# Altium PCB CR-10 Motherboard.PcbDoc (part 5 of 14)
Units mil, origin at the board's own origin, x right, y up, seen from the top; angles counter-clockwise.
Board outline 3970.48 x 2769.68 mil, 2 copper layers (TopLayer, BottomLayer); 147 components, 128 nets, 667 pads, 614 vias.
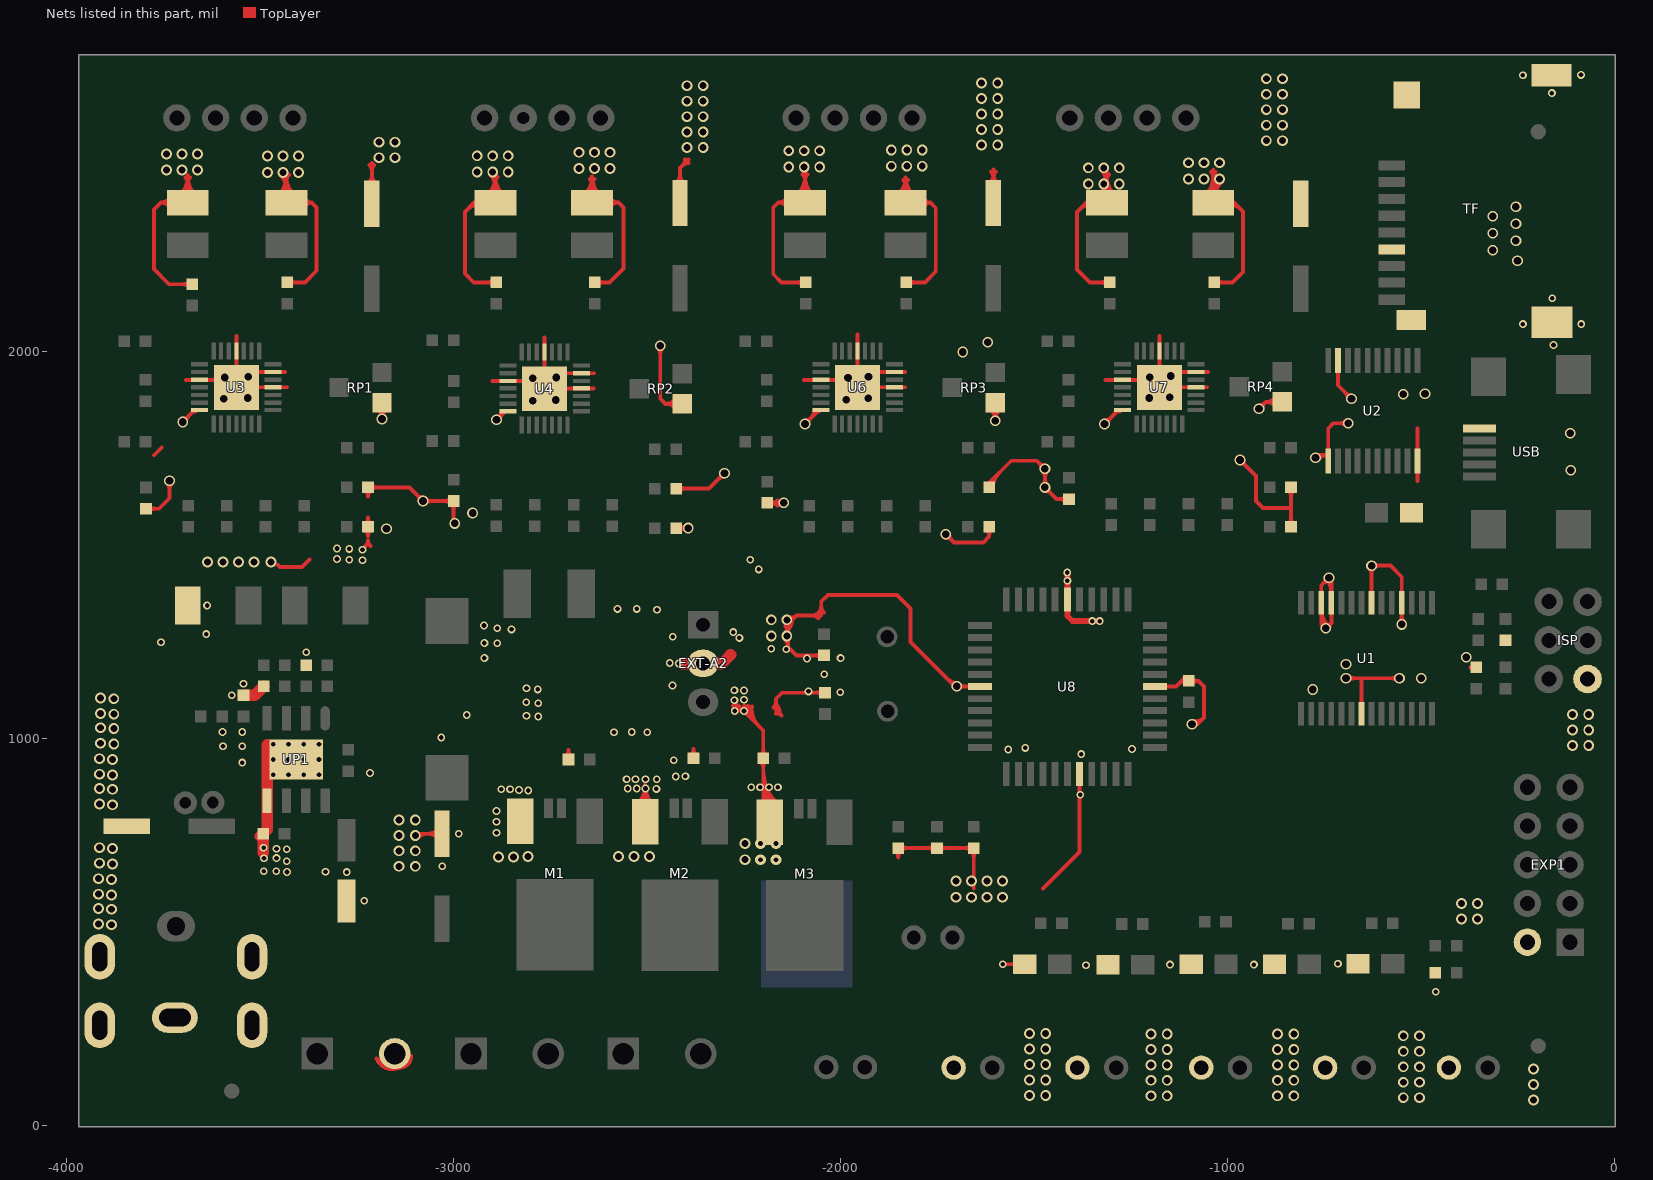
[diagram p5: the nets of this part, all layers, seen from the top]

## Via types
v1: diameter 28, hole 18, TopLayer to BottomLayer, tented both sides, 246 vias
v2: diameter 27.56, hole 19.68, TopLayer to BottomLayer, tented both sides, 196 vias
v3: diameter 20, hole 12, TopLayer to BottomLayer, tented both sides, 124 vias
v4: diameter 27.56, hole 11.81, TopLayer to BottomLayer, tented bottom, 16 vias
v5: diameter 27.56, hole 19.68, TopLayer to BottomLayer, 16 vias
v6: diameter 20, hole 12, TopLayer to BottomLayer, 12 vias
v7: diameter 28, hole 11.81, TopLayer to BottomLayer, tented both sides, 4 vias

## Nets (pads, with @x,y where several pads share a name; then routed paths per layer and width w, separated by ;. In a path a pad name is that pad's centre, name@x,y a point inside that pad or via, vN(x,y) a via of type N, cw(c..) or ccw(c..) an arc to the next point about the centre after c; other vN are vias at no path point) (continued)
GND: (continued)
  TopLayer w10: v2@-1727.54,1520.06 cw(c-1727.54,1498.87) -1712.55,1513.85 ; v2@-1727.54,1520.06 cw(c-1727.54,1498.87) -1712.55,1513.85 ; v2@-1727.54,1520.06 cw(c-1727.54,1498.87) -1712.55,1513.85 ; -1721.35,1153.66 ccw(c-1699.54,1175.47) v2@-1699.54,1144.62 ; -1721.35,1153.66 ccw(c-1699.54,1175.47) v2@-1699.54,1144.62 ; -1721.35,1153.66 ccw(c-1699.54,1175.47) v2@-1699.54,1144.62 ; -1721.35,1153.66 ccw(c-1699.54,1175.47) v2@-1699.54,1144.62 ; -1721.35,1153.66 ccw(c-1699.54,1175.47) v2@-1699.54,1144.62 ; -1721.35,1153.66 ccw(c-1699.54,1175.47) v2@-1699.54,1144.62 ; -1721.35,1153.66 ccw(c-1699.54,1175.47) v2@-1699.54,1144.62 ; -1721.35,1153.66 ccw(c-1699.54,1175.47) v2@-1699.54,1144.62 ; -1721.35,1153.66 ccw(c-1699.54,1175.47) v2@-1699.54,1144.62 ; v2@-1718.76,1528.84 ccw(c-1697.56,1528.84) -1712.55,1513.85 ; v2@-1718.76,1528.84 ccw(c-1697.56,1528.84) -1712.55,1513.85 ; v2@-1718.76,1528.84 ccw(c-1697.56,1528.84) -1712.55,1513.85 ; v2@-1718.76,1528.84 ccw(c-1697.56,1528.84) -1712.55,1513.85 ; v2@-1718.76,1528.84 ccw(c-1697.56,1528.84) -1712.55,1513.85 ; v2@-1718.76,1528.84 ccw(c-1697.56,1528.84) -1712.55,1513.85 ; v2@-1718.76,1528.84 ccw(c-1697.56,1528.84) -1712.55,1513.85 ; v2@-1718.76,1528.84 ccw(c-1697.56,1528.84) -1712.55,1513.85 ; v2@-1718.76,1528.84 ccw(c-1697.56,1528.84) -1712.55,1513.85 ; -1711.69,1144 cw(c-1719.85,1135.84) v2@-1708.31,1135.84 ; -1711.69,1144 cw(c-1719.85,1135.84) v2@-1708.31,1135.84 ; -1711.69,1144 cw(c-1719.85,1135.84) v2@-1708.31,1135.84 ; -1711.69,1144 cw(c-1719.85,1135.84) v2@-1708.31,1135.84 ; -1711.69,1144 cw(c-1719.85,1135.84) v2@-1708.31,1135.84 ; -1711.69,1144 cw(c-1719.85,1135.84) v2@-1708.31,1135.84 ; -1711.69,1144 cw(c-1719.85,1135.84) v2@-1708.31,1135.84 ; -1711.69,1144 cw(c-1719.85,1135.84) v2@-1708.31,1135.84 ; -1711.69,1144 cw(c-1719.85,1135.84) v2@-1708.31,1135.84 ; v2@-1693.33,1129.63 cw(c-1678.34,1114.65) -1678.34,1135.84 ; v2@-1693.33,1129.63 cw(c-1678.34,1114.65) -1678.34,1135.84 ; v2@-1693.33,1129.63 cw(c-1678.34,1114.65) -1678.34,1135.84 ; v2@-1693.33,1129.63 cw(c-1678.34,1114.65) -1678.34,1135.84 ; v2@-1693.33,1129.63 cw(c-1678.34,1114.65) -1678.34,1135.84 ; v2@-1693.33,1129.63 cw(c-1678.34,1114.65) -1678.34,1135.84 ; v2@-1693.33,1129.63 cw(c-1678.34,1114.65) -1678.34,1135.84 ; v2@-1693.33,1129.63 cw(c-1678.34,1114.65) -1678.34,1135.84 ; v2@-1693.33,1129.63 cw(c-1678.34,1114.65) -1678.34,1135.84 ; v2@-1693.33,1142.05 ccw(c-1678.34,1157.04) -1678.34,1135.84 ; v2@-1693.33,1142.05 ccw(c-1678.34,1157.04) -1678.34,1135.84 ; v2@-1693.33,1142.05 ccw(c-1678.34,1157.04) -1678.34,1135.84 ; v2@-1693.33,1142.05 ccw(c-1678.34,1157.04) -1678.34,1135.84 ; v2@-1693.33,1142.05 ccw(c-1678.34,1157.04) -1678.34,1135.84 ; v2@-1693.33,1142.05 ccw(c-1678.34,1157.04) -1678.34,1135.84 ; v2@-1693.33,1142.05 ccw(c-1678.34,1157.04) -1678.34,1135.84 ; v2@-1693.33,1142.05 ccw(c-1678.34,1157.04) -1678.34,1135.84 ; v2@-1693.33,1142.05 ccw(c-1678.34,1157.04) -1678.34,1135.84 ; -1679.68,717.84 cw(c-1679.68,693.7) C42.2@-1662.61,710.77 ; -1679.68,717.84 ccw(c-1679.68,741.98) C42.2@-1662.61,724.91 ; -1679.68,717.84 cw(c-1679.68,693.7) C42.2@-1662.61,710.77 ; -1679.68,717.84 ccw(c-1679.68,741.98) C42.2@-1662.61,724.91 ; -1679.68,717.84 cw(c-1679.68,693.7) C42.2@-1662.61,710.77 ; -1679.68,717.84 ccw(c-1679.68,741.98) C42.2@-1662.61,724.91 ; -1679.68,717.84 cw(c-1679.68,693.7) C42.2@-1662.61,710.77 ; -1679.68,717.84 ccw(c-1679.68,741.98) C42.2@-1662.61,724.91 ; -1679.68,717.84 cw(c-1679.68,693.7) C42.2@-1662.61,710.77 ; -1679.68,717.84 ccw(c-1679.68,741.98) C42.2@-1662.61,724.91 ; -1679.68,717.84 ccw(c-1679.68,741.98) C42.2@-1662.61,724.91 ; -1679.68,717.84 cw(c-1679.68,693.7) C42.2@-1662.61,710.77 ; -1679.68,717.84 ccw(c-1679.68,741.98) C42.2@-1662.61,724.91 ; -1679.68,717.84 cw(c-1679.68,693.7) C42.2@-1662.61,710.77 ; -1679.68,717.84 ccw(c-1679.68,741.98) C42.2@-1662.61,724.91 ; -1679.68,717.84 cw(c-1679.68,693.7) C42.2@-1662.61,710.77 ; -1679.68,717.84 ccw(c-1679.68,741.98) C42.2@-1662.61,724.91 ; -1679.68,717.84 cw(c-1679.68,693.7) C42.2@-1662.61,710.77 ; -1671.19,1135.84 cw(c-1671.19,1126.19) U8.6@-1664.36,1133.01 ; -1671.19,1135.84 ccw(c-1671.19,1145.5) U8.6@-1664.36,1138.67 ; -1671.19,1135.84 cw(c-1671.19,1126.19) U8.6@-1664.36,1133.01 ; -1671.19,1135.84 ccw(c-1671.19,1145.5) U8.6@-1664.36,1138.67 ; -1671.19,1135.84 cw(c-1671.19,1126.19) U8.6@-1664.36,1133.01 ; -1671.19,1135.84 ccw(c-1671.19,1145.5) U8.6@-1664.36,1138.67 ; -1671.19,1135.84 ccw(c-1671.19,1145.5) U8.6@-1664.36,1138.67 ; -1671.19,1135.84 cw(c-1671.19,1126.19) U8.6@-1664.36,1133.01 ; -1671.19,1135.84 ccw(c-1671.19,1145.5) U8.6@-1664.36,1138.67 ; -1671.19,1135.84 cw(c-1671.19,1126.19) U8.6@-1664.36,1133.01 ; -1671.19,1135.84 ccw(c-1671.19,1145.5) U8.6@-1664.36,1138.67 ; -1671.19,1135.84 cw(c-1671.19,1126.19) U8.6@-1664.36,1133.01 ; C42.2@-1662.61,710.77 cw(c-1679.68,693.7) -1655.54,693.7 ; C42.2@-1662.61,710.77 cw(c-1679.68,693.7) -1655.54,693.7 ; C42.2@-1662.61,710.77 cw(c-1679.68,693.7) -1655.54,693.7 ; C42.2@-1662.61,710.77 cw(c-1679.68,693.7) -1655.54,693.7 ; C42.2@-1662.61,710.77 cw(c-1679.68,693.7) -1655.54,693.7 ; C42.2@-1662.61,710.77 cw(c-1679.68,693.7) -1655.54,693.7 ; C42.2@-1662.61,710.77 cw(c-1679.68,693.7) -1655.54,693.7 ; C42.2@-1662.61,710.77 cw(c-1679.68,693.7) -1655.54,693.7 ; C42.2@-1662.61,710.77 cw(c-1679.68,693.7) -1655.54,693.7 ; -1655.54,693.7 cw(c-1631.39,693.7) C42.2@-1648.46,710.77 ; -1655.54,693.7 cw(c-1631.39,693.7) C42.2@-1648.46,710.77 ; -1655.54,693.7 cw(c-1631.39,693.7) C42.2@-1648.46,710.77 ; -1655.54,693.7 cw(c-1631.39,693.7) C42.2@-1648.46,710.77 ; -1655.54,693.7 cw(c-1631.39,693.7) C42.2@-1648.46,710.77 ; -1655.54,693.7 cw(c-1631.39,693.7) C42.2@-1648.46,710.77 ; -1655.54,693.7 cw(c-1631.39,693.7) C42.2@-1648.46,710.77 ; -1655.54,693.7 cw(c-1631.39,693.7) C42.2@-1648.46,710.77 ; -1655.54,693.7 cw(c-1631.39,693.7) C42.2@-1648.46,710.77 ; R20.2@-1622.69,1540.81 cw(c-1639.76,1523.74) -1615.62,1523.74 ; R20.2@-1622.69,1540.81 cw(c-1639.76,1523.74) -1615.62,1523.74 ; R20.2@-1622.69,1540.81 cw(c-1639.76,1523.74) -1615.62,1523.74 ; R20.2@-1622.69,1540.81 cw(c-1639.76,1523.74) -1615.62,1523.74 ; R20.2@-1622.69,1540.81 cw(c-1639.76,1523.74) -1615.62,1523.74 ; R20.2@-1622.69,1540.81 cw(c-1639.76,1523.74) -1615.62,1523.74 ; R20.2@-1622.69,1540.81 cw(c-1639.76,1523.74) -1615.62,1523.74 ; R20.2@-1622.69,1540.81 cw(c-1639.76,1523.74) -1615.62,1523.74 ; R20.2@-1622.69,1540.81 cw(c-1639.76,1523.74) -1615.62,1523.74 ; -1615.62,1523.74 cw(c-1591.48,1523.74) R20.2@-1608.55,1540.81 ; -1615.62,1523.74 cw(c-1591.48,1523.74) R20.2@-1608.55,1540.81 ; -1615.62,1523.74 cw(c-1591.48,1523.74) R20.2@-1608.55,1540.81 ; -1615.62,1523.74 cw(c-1591.48,1523.74) R20.2@-1608.55,1540.81 ; -1615.62,1523.74 cw(c-1591.48,1523.74) R20.2@-1608.55,1540.81 ; -1615.62,1523.74 cw(c-1591.48,1523.74) R20.2@-1608.55,1540.81 ; -1615.62,1523.74 cw(c-1591.48,1523.74) R20.2@-1608.55,1540.81 ; -1615.62,1523.74 cw(c-1591.48,1523.74) R20.2@-1608.55,1540.81 ; -1615.62,1523.74 cw(c-1591.48,1523.74) R20.2@-1608.55,1540.81 ; C21.2@-1615.62,1649.88 cw(c-1586.96,1649.88) -1607.23,1670.15 ; C21.2@-1615.62,1649.88 cw(c-1586.96,1649.88) -1607.23,1670.15 ; C21.2@-1615.62,1649.88 cw(c-1586.96,1649.88) -1607.23,1670.15 ; C21.2@-1615.62,1649.88 cw(c-1586.96,1649.88) -1607.23,1670.15 ; C21.2@-1615.62,1649.88 cw(c-1586.96,1649.88) -1607.23,1670.15 ; C21.2@-1615.62,1649.88 cw(c-1586.96,1649.88) -1607.23,1670.15 ; C21.2@-1615.62,1649.88 cw(c-1586.96,1649.88) -1607.23,1670.15 ; C21.2@-1615.62,1649.88 cw(c-1586.96,1649.88) -1607.23,1670.15 ; C21.2@-1615.62,1649.88 cw(c-1586.96,1649.88) -1607.23,1670.15 ; C3.2@-1615.14,2435.45 ccw(c-1640.75,2461.06) -1604.54,2461.06 ; C3.2@-1615.14,2435.45 ccw(c-1640.75,2461.06) -1604.54,2461.06 ; C3.2@-1615.14,2435.45 ccw(c-1640.75,2461.06) -1604.54,2461.06 ; C3.2@-1615.14,2435.45 ccw(c-1640.75,2461.06) -1604.54,2461.06 ; C3.2@-1615.14,2435.45 ccw(c-1640.75,2461.06) -1604.54,2461.06 ; C3.2@-1615.14,2435.45 ccw(c-1640.75,2461.06) -1604.54,2461.06 ; C3.2@-1615.14,2435.45 ccw(c-1640.75,2461.06) -1604.54,2461.06 ; C3.2@-1615.14,2435.45 ccw(c-1640.75,2461.06) -1604.54,2461.06 ; C3.2@-1615.14,2435.45 ccw(c-1640.75,2461.06) -1604.54,2461.06 ; RP3.2@-1613.48,1854.46 cw(c-1644.73,1821.93) v2(-1599.62,1821.93) ; RP3.2@-1613.48,1854.46 cw(c-1644.73,1821.93) v2(-1599.62,1821.93) ; RP3.2@-1613.48,1854.46 cw(c-1644.73,1821.93) v2(-1599.62,1821.93) ; RP3.2@-1613.48,1854.46 cw(c-1644.73,1821.93) v2(-1599.62,1821.93) ; RP3.2@-1613.48,1854.46 cw(c-1644.73,1821.93) v2(-1599.62,1821.93) ; RP3.2@-1613.48,1854.46 cw(c-1644.73,1821.93) v2(-1599.62,1821.93) ; RP3.2@-1613.48,1854.46 cw(c-1644.73,1821.93) v2(-1599.62,1821.93) ; RP3.2@-1613.48,1854.46 cw(c-1644.73,1821.93) v2(-1599.62,1821.93) ; RP3.2@-1613.48,1854.46 cw(c-1644.73,1821.93) v2(-1599.62,1821.93) ; -1610.74,2465.63 cw(c-1625.73,2450.65) -1604.54,2450.65 ; -1610.74,2465.63 cw(c-1625.73,2450.65) -1604.54,2450.65 ; -1610.74,2465.63 cw(c-1625.73,2450.65) -1604.54,2450.65 ; -1610.74,2465.63 cw(c-1625.73,2450.65) -1604.54,2450.65 ; -1610.74,2465.63 cw(c-1625.73,2450.65) -1604.54,2450.65 ; -1610.74,2465.63 cw(c-1625.73,2450.65) -1604.54,2450.65 ; -1610.74,2465.63 cw(c-1625.73,2450.65) -1604.54,2450.65 ; -1610.74,2465.63 cw(c-1625.73,2450.65) -1604.54,2450.65 ; v2@-1605.83,1828.14 ccw(c-1620.82,1843.13) -1599.62,1843.13 ; v2@-1605.83,1828.14 ccw(c-1620.82,1843.13) -1599.62,1843.13 ; v2@-1605.83,1828.14 ccw(c-1620.82,1843.13) -1599.62,1843.13 ; v2@-1605.83,1828.14 ccw(c-1620.82,1843.13) -1599.62,1843.13 ; v2@-1605.83,1828.14 ccw(c-1620.82,1843.13) -1599.62,1843.13 ; v2@-1605.83,1828.14 ccw(c-1620.82,1843.13) -1599.62,1843.13 ; v2@-1605.83,1828.14 ccw(c-1620.82,1843.13) -1599.62,1843.13 ; v2@-1605.83,1828.14 ccw(c-1620.82,1843.13) -1599.62,1843.13 ; v2@-1605.83,1828.14 ccw(c-1620.82,1843.13) -1599.62,1843.13 ; C21.2@-1605.62,1649.88 cw(c-1552.81,1649.88) -1590.16,1687.22 ; C21.2@-1605.62,1649.88 cw(c-1552.81,1649.88) -1590.16,1687.22 ; C21.2@-1605.62,1649.88 cw(c-1552.81,1649.88) -1590.16,1687.22 ; C21.2@-1605.62,1649.88 cw(c-1552.81,1649.88) -1590.16,1687.22 ; C21.2@-1605.62,1649.88 cw(c-1552.81,1649.88) -1590.16,1687.22 ; C21.2@-1605.62,1649.88 cw(c-1552.81,1649.88) -1590.16,1687.22 ; C21.2@-1605.62,1649.88 cw(c-1552.81,1649.88) -1590.16,1687.22 ; C21.2@-1605.62,1649.88 cw(c-1552.81,1649.88) -1590.16,1687.22 ; C21.2@-1605.62,1649.88 cw(c-1552.81,1649.88) -1590.16,1687.22 ; -1604.54,2450.65 cw(c-1583.34,2450.65) -1598.33,2465.63 ; -1604.54,2450.65 cw(c-1583.34,2450.65) -1598.33,2465.63 ; -1604.54,2450.65 cw(c-1583.34,2450.65) -1598.33,2465.63 ; -1604.54,2450.65 cw(c-1583.34,2450.65) -1598.33,2465.63 ; -1604.54,2450.65 cw(c-1583.34,2450.65) -1598.33,2465.63 ; -1604.54,2450.65 cw(c-1583.34,2450.65) -1598.33,2465.63 ; -1604.54,2450.65 cw(c-1583.34,2450.65) -1598.33,2465.63 ; -1604.54,2450.65 cw(c-1583.34,2450.65) -1598.33,2465.63 ; -1604.54,2461.06 ccw(c-1568.32,2461.06) C3.2@-1593.93,2435.45 ; -1604.54,2461.06 ccw(c-1568.32,2461.06) C3.2@-1593.93,2435.45 ; -1604.54,2461.06 ccw(c-1568.32,2461.06) C3.2@-1593.93,2435.45 ; -1604.54,2461.06 ccw(c-1568.32,2461.06) C3.2@-1593.93,2435.45 ; -1604.54,2461.06 ccw(c-1568.32,2461.06) C3.2@-1593.93,2435.45 ; -1604.54,2461.06 ccw(c-1568.32,2461.06) C3.2@-1593.93,2435.45 ; -1604.54,2461.06 ccw(c-1568.32,2461.06) C3.2@-1593.93,2435.45 ; -1604.54,2461.06 ccw(c-1568.32,2461.06) C3.2@-1593.93,2435.45 ; -1604.54,2461.06 ccw(c-1568.32,2461.06) C3.2@-1593.93,2435.45 ; v2(-1599.62,1821.93) cw(c-1554.52,1821.93) RP3.2@-1585.77,1854.46 ; v2(-1599.62,1821.93) cw(c-1554.52,1821.93) RP3.2@-1585.77,1854.46 ; v2(-1599.62,1821.93) cw(c-1554.52,1821.93) RP3.2@-1585.77,1854.46 ; v2(-1599.62,1821.93) cw(c-1554.52,1821.93) RP3.2@-1585.77,1854.46 ; v2(-1599.62,1821.93) cw(c-1554.52,1821.93) RP3.2@-1585.77,1854.46 ; v2(-1599.62,1821.93) cw(c-1554.52,1821.93) RP3.2@-1585.77,1854.46 ; v2(-1599.62,1821.93) cw(c-1554.52,1821.93) RP3.2@-1585.77,1854.46 ; v2(-1599.62,1821.93) cw(c-1554.52,1821.93) RP3.2@-1585.77,1854.46 ; v2(-1599.62,1821.93) cw(c-1554.52,1821.93) RP3.2@-1585.77,1854.46 ; -1599.62,1843.13 ccw(c-1578.43,1843.13) v2@-1593.41,1828.14 ; -1599.62,1843.13 ccw(c-1578.43,1843.13) v2@-1593.41,1828.14 ; -1599.62,1843.13 ccw(c-1578.43,1843.13) v2@-1593.41,1828.14 ; -1599.62,1843.13 ccw(c-1578.43,1843.13) v2@-1593.41,1828.14 ; -1599.62,1843.13 ccw(c-1578.43,1843.13) v2@-1593.41,1828.14 ; -1599.62,1843.13 ccw(c-1578.43,1843.13) v2@-1593.41,1828.14 ; -1599.62,1843.13 ccw(c-1578.43,1843.13) v2@-1593.41,1828.14 ; -1599.62,1843.13 ccw(c-1578.43,1843.13) v2@-1593.41,1828.14 ; -1599.62,1843.13 ccw(c-1578.43,1843.13) v2@-1593.41,1828.14 ; -1486.52,1712.83 cw(c-1501.51,1697.84) v2@-1480.31,1697.84 ; -1486.52,1712.83 ccw(c-1471.54,1727.82) v2@-1471.54,1706.62 ; -1486.52,1712.83 cw(c-1501.51,1697.84) v2@-1480.31,1697.84 ; -1486.52,1712.83 ccw(c-1471.54,1727.82) v2@-1471.54,1706.62 ; -1486.52,1712.83 cw(c-1501.51,1697.84) v2@-1480.31,1697.84 ; -1486.52,1712.83 ccw(c-1471.54,1727.82) v2@-1471.54,1706.62 ; -1486.52,1712.83 cw(c-1501.51,1697.84) v2@-1480.31,1697.84 ; -1486.52,1712.83 ccw(c-1471.54,1727.82) v2@-1471.54,1706.62 ; -1486.52,1712.83 cw(c-1501.51,1697.84) v2@-1480.31,1697.84 ; -1486.52,1712.83 ccw(c-1471.54,1727.82) v2@-1471.54,1706.62 ; -1486.52,1712.83 ccw(c-1471.54,1727.82) v2@-1471.54,1706.62 ; -1486.52,1712.83 cw(c-1501.51,1697.84) v2@-1480.31,1697.84 ; -1486.52,1712.83 ccw(c-1471.54,1727.82) v2@-1471.54,1706.62 ; -1486.52,1712.83 cw(c-1501.51,1697.84) v2@-1480.31,1697.84 ; -1486.52,1712.83 ccw(c-1471.54,1727.82) v2@-1471.54,1706.62 ; -1486.52,1712.83 cw(c-1501.51,1697.84) v2@-1480.31,1697.84 ; -1486.52,1712.83 ccw(c-1471.54,1727.82) v2@-1471.54,1706.62 ; -1486.52,1712.83 cw(c-1501.51,1697.84) v2@-1480.31,1697.84 ; v2@-1477.74,1656.05 ccw(c-1492.73,1671.04) -1471.54,1671.04 ; v2@-1477.74,1656.05 ccw(c-1492.73,1671.04) -1471.54,1671.04 ; v2@-1477.74,1656.05 ccw(c-1492.73,1671.04) -1471.54,1671.04 ; v2@-1477.74,1656.05 ccw(c-1492.73,1671.04) -1471.54,1671.04 ; v2@-1477.74,1656.05 ccw(c-1492.73,1671.04) -1471.54,1671.04 ; v2@-1477.74,1656.05 ccw(c-1492.73,1671.04) -1471.54,1671.04 ; v2@-1477.74,1656.05 ccw(c-1492.73,1671.04) -1471.54,1671.04 ; v2@-1477.74,1656.05 ccw(c-1492.73,1671.04) -1471.54,1671.04 ; v2@-1477.74,1656.05 ccw(c-1492.73,1671.04) -1471.54,1671.04 ; v2@-1477.74,1691.63 cw(c-1492.73,1676.65) -1471.54,1676.65 ; v2@-1477.74,1691.63 cw(c-1492.73,1676.65) -1471.54,1676.65 ; v2@-1477.74,1691.63 cw(c-1492.73,1676.65) -1471.54,1676.65 ; v2@-1477.74,1691.63 cw(c-1492.73,1676.65) -1471.54,1676.65 ; v2@-1477.74,1691.63 cw(c-1492.73,1676.65) -1471.54,1676.65 ; v2@-1477.74,1691.63 cw(c-1492.73,1676.65) -1471.54,1676.65 ; v2@-1477.74,1691.63 cw(c-1492.73,1676.65) -1471.54,1676.65 ; v2@-1477.74,1691.63 cw(c-1492.73,1676.65) -1471.54,1676.65 ; v2@-1477.74,1691.63 cw(c-1492.73,1676.65) -1471.54,1676.65 ; v2@-1471.54,1641.06 cw(c-1471.54,1619.87) -1456.55,1634.85 ; v2@-1471.54,1641.06 cw(c-1471.54,1619.87) -1456.55,1634.85 ; v2@-1471.54,1641.06 cw(c-1471.54,1619.87) -1456.55,1634.85 ; v2@-1471.54,1641.06 cw(c-1471.54,1619.87) -1456.55,1634.85 ; v2@-1471.54,1641.06 cw(c-1471.54,1619.87) -1456.55,1634.85 ; v2@-1471.54,1641.06 cw(c-1471.54,1619.87) -1456.55,1634.85 ; v2@-1471.54,1641.06 cw(c-1471.54,1619.87) -1456.55,1634.85 ; v2@-1471.54,1641.06 cw(c-1471.54,1619.87) -1456.55,1634.85 ; v2@-1471.54,1641.06 cw(c-1471.54,1619.87) -1456.55,1634.85 ; -1471.54,1671.04 ccw(c-1450.34,1671.04) v2@-1465.33,1656.05 ; -1471.54,1671.04 ccw(c-1450.34,1671.04) v2@-1465.33,1656.05 ; -1471.54,1671.04 ccw(c-1450.34,1671.04) v2@-1465.33,1656.05 ; -1471.54,1671.04 ccw(c-1450.34,1671.04) v2@-1465.33,1656.05 ; -1471.54,1671.04 ccw(c-1450.34,1671.04) v2@-1465.33,1656.05 ; -1471.54,1671.04 ccw(c-1450.34,1671.04) v2@-1465.33,1656.05 ; -1471.54,1671.04 ccw(c-1450.34,1671.04) v2@-1465.33,1656.05 ; -1471.54,1671.04 ccw(c-1450.34,1671.04) v2@-1465.33,1656.05 ; -1471.54,1671.04 ccw(c-1450.34,1671.04) v2@-1465.33,1656.05 ; -1471.54,1676.65 cw(c-1450.34,1676.65) v2@-1465.33,1691.63 ; -1471.54,1676.65 cw(c-1450.34,1676.65) v2@-1465.33,1691.63 ; -1471.54,1676.65 cw(c-1450.34,1676.65) v2@-1465.33,1691.63 ; -1471.54,1676.65 cw(c-1450.34,1676.65) v2@-1465.33,1691.63 ; -1471.54,1676.65 cw(c-1450.34,1676.65) v2@-1465.33,1691.63 ; -1471.54,1676.65 cw(c-1450.34,1676.65) v2@-1465.33,1691.63 ; -1471.54,1676.65 cw(c-1450.34,1676.65) v2@-1465.33,1691.63 ; -1471.54,1676.65 cw(c-1450.34,1676.65) v2@-1465.33,1691.63 ; -1471.54,1676.65 cw(c-1450.34,1676.65) v2@-1465.33,1691.63 ; v2@-1462.76,1649.84 ccw(c-1441.56,1649.84) -1456.55,1634.85 ; v2@-1462.76,1649.84 ccw(c-1441.56,1649.84) -1456.55,1634.85 ; v2@-1462.76,1649.84 ccw(c-1441.56,1649.84) -1456.55,1634.85 ; v2@-1462.76,1649.84 ccw(c-1441.56,1649.84) -1456.55,1634.85 ; v2@-1462.76,1649.84 ccw(c-1441.56,1649.84) -1456.55,1634.85 ; v2@-1462.76,1649.84 ccw(c-1441.56,1649.84) -1456.55,1634.85 ; v2@-1462.76,1649.84 ccw(c-1441.56,1649.84) -1456.55,1634.85 ; v2@-1462.76,1649.84 ccw(c-1441.56,1649.84) -1456.55,1634.85 ; v2@-1462.76,1649.84 ccw(c-1441.56,1649.84) -1456.55,1634.85 ; -1433.59,1619.8 cw(c-1433.59,1595.66) C40.2@-1416.52,1612.73 ; -1433.59,1619.8 ccw(c-1433.59,1643.95) C40.2@-1416.52,1626.87 ; -1433.59,1619.8 cw(c-1433.59,1595.66) C40.2@-1416.52,1612.73 ; -1433.59,1619.8 ccw(c-1433.59,1643.95) C40.2@-1416.52,1626.87 ; -1433.59,1619.8 cw(c-1433.59,1595.66) C40.2@-1416.52,1612.73 ; -1433.59,1619.8 ccw(c-1433.59,1643.95) C40.2@-1416.52,1626.87 ; -1433.59,1619.8 cw(c-1433.59,1595.66) C40.2@-1416.52,1612.73 ; -1433.59,1619.8 ccw(c-1433.59,1643.95) C40.2@-1416.52,1626.87 ; -1433.59,1619.8 cw(c-1433.59,1595.66) C40.2@-1416.52,1612.73 ; -1433.59,1619.8 ccw(c-1433.59,1643.95) C40.2@-1416.52,1626.87 ; -1433.59,1619.8 ccw(c-1433.59,1643.95) C40.2@-1416.52,1626.87 ; -1433.59,1619.8 cw(c-1433.59,1595.66) C40.2@-1416.52,1612.73 ; -1433.59,1619.8 ccw(c-1433.59,1643.95) C40.2@-1416.52,1626.87 ; -1433.59,1619.8 cw(c-1433.59,1595.66) C40.2@-1416.52,1612.73 ; -1433.59,1619.8 ccw(c-1433.59,1643.95) C40.2@-1416.52,1626.87 ; -1433.59,1619.8 cw(c-1433.59,1595.66) C40.2@-1416.52,1612.73 ; -1433.59,1619.8 ccw(c-1433.59,1643.95) C40.2@-1416.52,1626.87 ; -1433.59,1619.8 cw(c-1433.59,1595.66) C40.2@-1416.52,1612.73 ; -1382.54,877.19 cw(c-1372.88,877.19) -1379.71,884.01 ccw(c-1372.88,877.19) -1382.54,877.19 ; -1382.54,877.19 ccw(c-1392.19,877.19) -1385.36,884.01 cw(c-1392.19,877.19) -1382.54,877.19 ; -1382.41,2367.97 cw(c-1350.74,2336.3) S7.2@-1335.3,2378.33 ; -1382.41,2367.97 cw(c-1350.74,2336.3) S7.2@-1335.3,2378.33 ; -1382.41,2367.97 cw(c-1350.74,2336.3) S7.2@-1335.3,2378.33 ; -1382.41,2367.97 cw(c-1350.74,2336.3) S7.2@-1335.3,2378.33 ; -1382.41,2367.97 cw(c-1350.74,2336.3) S7.2@-1335.3,2378.33 ; -1382.41,2367.97 cw(c-1350.74,2336.3) S7.2@-1335.3,2378.33 ; -1382.41,2367.97 cw(c-1350.74,2336.3) S7.2@-1335.3,2378.33 ; -1382.41,2367.97 cw(c-1350.74,2336.3) S7.2@-1335.3,2378.33 ; -1382.41,2367.97 cw(c-1350.74,2336.3) S7.2@-1335.3,2378.33 ; -1371.35,2379.03 cw(c-1344.8,2352.48) S7.2@-1331.85,2387.72 ; -1371.35,2379.03 cw(c-1344.8,2352.48) S7.2@-1331.85,2387.72 ; -1371.35,2379.03 cw(c-1344.8,2352.48) S7.2@-1331.85,2387.72 ; -1371.35,2379.03 cw(c-1344.8,2352.48) S7.2@-1331.85,2387.72 ; -1371.35,2379.03 cw(c-1344.8,2352.48) S7.2@-1331.85,2387.72 ; -1371.35,2379.03 cw(c-1344.8,2352.48) S7.2@-1331.85,2387.72 ; -1371.35,2379.03 cw(c-1344.8,2352.48) S7.2@-1331.85,2387.72 ; -1371.35,2379.03 cw(c-1344.8,2352.48) S7.2@-1331.85,2387.72 ; -1371.35,2379.03 cw(c-1344.8,2352.48) S7.2@-1331.85,2387.72 ; S7.2@-1331.33,2405.64 ccw(c-1379.13,2453.44) -1311.54,2453.44 ; S7.2@-1331.33,2405.64 ccw(c-1379.13,2453.44) -1311.54,2453.44 ; S7.2@-1331.33,2405.64 ccw(c-1379.13,2453.44) -1311.54,2453.44 ; S7.2@-1331.33,2405.64 ccw(c-1379.13,2453.44) -1311.54,2453.44 ; S7.2@-1331.33,2405.64 ccw(c-1379.13,2453.44) -1311.54,2453.44 ; S7.2@-1331.33,2405.64 ccw(c-1379.13,2453.44) -1311.54,2453.44 ; S7.2@-1331.33,2405.64 ccw(c-1379.13,2453.44) -1311.54,2453.44 ; S7.2@-1331.33,2405.64 ccw(c-1379.13,2453.44) -1311.54,2453.44 ; S7.2@-1331.33,2405.64 ccw(c-1379.13,2453.44) -1311.54,2453.44 ; -1328.68,2179.84 cw(c-1328.68,2155.7) C23.1@-1311.61,2172.77 ; -1328.68,2179.84 ccw(c-1328.68,2203.98) C23.1@-1311.61,2186.91 ; -1328.68,2179.84 cw(c-1328.68,2155.7) C23.1@-1311.61,2172.77 ; -1328.68,2179.84 ccw(c-1328.68,2203.98) C23.1@-1311.61,2186.91 ; -1328.68,2179.84 cw(c-1328.68,2155.7) C23.1@-1311.61,2172.77 ; -1328.68,2179.84 ccw(c-1328.68,2203.98) C23.1@-1311.61,2186.91 ; -1328.68,2179.84 cw(c-1328.68,2155.7) C23.1@-1311.61,2172.77 ; -1328.68,2179.84 ccw(c-1328.68,2203.98) C23.1@-1311.61,2186.91 ; -1328.68,2179.84 cw(c-1328.68,2155.7) C23.1@-1311.61,2172.77 ; -1328.68,2179.84 ccw(c-1328.68,2203.98) C23.1@-1311.61,2186.91 ; -1328.68,2179.84 ccw(c-1328.68,2203.98) C23.1@-1311.61,2186.91 ; -1328.68,2179.84 cw(c-1328.68,2155.7) C23.1@-1311.61,2172.77 ; -1328.68,2179.84 ccw(c-1328.68,2203.98) C23.1@-1311.61,2186.91 ; -1328.68,2179.84 cw(c-1328.68,2155.7) C23.1@-1311.61,2172.77 ; -1328.68,2179.84 ccw(c-1328.68,2203.98) C23.1@-1311.61,2186.91 ; -1328.68,2179.84 cw(c-1328.68,2155.7) C23.1@-1311.61,2172.77 ; -1328.68,2179.84 ccw(c-1328.68,2203.98) C23.1@-1311.61,2186.91 ; -1328.68,2179.84 cw(c-1328.68,2155.7) C23.1@-1311.61,2172.77 ; S7.2@-1324.26,2398.57 ccw(c-1354.99,2429.3) v1@-1311.54,2429.3 ; S7.2@-1324.26,2398.57 ccw(c-1354.99,2429.3) v1@-1311.54,2429.3 ; S7.2@-1324.26,2398.57 ccw(c-1354.99,2429.3) v1@-1311.54,2429.3 ; S7.2@-1324.26,2398.57 ccw(c-1354.99,2429.3) v1@-1311.54,2429.3 ; S7.2@-1324.26,2398.57 ccw(c-1354.99,2429.3) v1@-1311.54,2429.3 ; S7.2@-1324.26,2398.57 ccw(c-1354.99,2429.3) v1@-1311.54,2429.3 ; S7.2@-1324.26,2398.57 ccw(c-1354.99,2429.3) v1@-1311.54,2429.3 ; S7.2@-1324.26,2398.57 ccw(c-1354.99,2429.3) v1@-1311.54,2429.3 ; S7.2@-1324.26,2398.57 ccw(c-1354.99,2429.3) v1@-1311.54,2429.3 ; -1317.74,2458.63 cw(c-1332.73,2443.65) v1@-1311.54,2443.65 ; -1317.74,2458.63 cw(c-1332.73,2443.65) v1@-1311.54,2443.65 ; -1317.74,2458.63 cw(c-1332.73,2443.65) v1@-1311.54,2443.65 ; -1317.74,2458.63 cw(c-1332.73,2443.65) v1@-1311.54,2443.65 ; -1317.74,2458.63 cw(c-1332.73,2443.65) v1@-1311.54,2443.65 ; -1317.74,2458.63 cw(c-1332.73,2443.65) v1@-1311.54,2443.65 ; -1317.74,2458.63 cw(c-1332.73,2443.65) v1@-1311.54,2443.65 ; -1317.74,2458.63 cw(c-1332.73,2443.65) v1@-1311.54,2443.65 ; v2@-1317.54,1822.62 ccw(c-1317.54,1843.82) -1302.55,1828.83 ; v2@-1317.54,1822.62 ccw(c-1317.54,1843.82) -1302.55,1828.83 ; v2@-1317.54,1822.62 ccw(c-1317.54,1843.82) -1302.55,1828.83 ; v2@-1317.54,1822.62 ccw(c-1317.54,1843.82) -1302.55,1828.83 ; v2@-1317.54,1822.62 ccw(c-1317.54,1843.82) -1302.55,1828.83 ; v2@-1317.54,1822.62 ccw(c-1317.54,1843.82) -1302.55,1828.83 ; v2@-1317.54,1822.62 ccw(c-1317.54,1843.82) -1302.55,1828.83 ; v2@-1317.54,1822.62 ccw(c-1317.54,1843.82) -1302.55,1828.83 ; v2@-1317.54,1822.62 ccw(c-1317.54,1843.82) -1302.55,1828.83 ; v1@-1311.54,2429.3 ccw(c-1268.08,2429.3) S7.2@-1298.81,2398.57 ; v1@-1311.54,2429.3 ccw(c-1268.08,2429.3) S7.2@-1298.81,2398.57 ; v1@-1311.54,2429.3 ccw(c-1268.08,2429.3) S7.2@-1298.81,2398.57 ; v1@-1311.54,2429.3 ccw(c-1268.08,2429.3) S7.2@-1298.81,2398.57 ; v1@-1311.54,2429.3 ccw(c-1268.08,2429.3) S7.2@-1298.81,2398.57 ; v1@-1311.54,2429.3 ccw(c-1268.08,2429.3) S7.2@-1298.81,2398.57 ; v1@-1311.54,2429.3 ccw(c-1268.08,2429.3) S7.2@-1298.81,2398.57 ; v1@-1311.54,2429.3 ccw(c-1268.08,2429.3) S7.2@-1298.81,2398.57 ; v1@-1311.54,2429.3 ccw(c-1268.08,2429.3) S7.2@-1298.81,2398.57 ; v1@-1311.54,2443.65 cw(c-1290.34,2443.65) -1305.33,2458.63 ; v1@-1311.54,2443.65 cw(c-1290.34,2443.65) -1305.33,2458.63 ; v1@-1311.54,2443.65 cw(c-1290.34,2443.65) -1305.33,2458.63 ; v1@-1311.54,2443.65 cw(c-1290.34,2443.65) -1305.33,2458.63 ; v1@-1311.54,2443.65 cw(c-1290.34,2443.65) -1305.33,2458.63 ; v1@-1311.54,2443.65 cw(c-1290.34,2443.65) -1305.33,2458.63 ; v1@-1311.54,2443.65 cw(c-1290.34,2443.65) -1305.33,2458.63 ; v1@-1311.54,2443.65 cw(c-1290.34,2443.65) -1305.33,2458.63 ; -1311.54,2453.44 ccw(c-1243.94,2453.44) S7.2@-1291.74,2405.64 ; -1311.54,2453.44 ccw(c-1243.94,2453.44) S7.2@-1291.74,2405.64 ; -1311.54,2453.44 ccw(c-1243.94,2453.44) S7.2@-1291.74,2405.64 ; -1311.54,2453.44 ccw(c-1243.94,2453.44) S7.2@-1291.74,2405.64 ; -1311.54,2453.44 ccw(c-1243.94,2453.44) S7.2@-1291.74,2405.64 ; -1311.54,2453.44 ccw(c-1243.94,2453.44) S7.2@-1291.74,2405.64 ; -1311.54,2453.44 ccw(c-1243.94,2453.44) S7.2@-1291.74,2405.64 ; -1311.54,2453.44 ccw(c-1243.94,2453.44) S7.2@-1291.74,2405.64 ; -1311.54,2453.44 ccw(c-1243.94,2453.44) S7.2@-1291.74,2405.64 ; v2@-1308.76,1813.84 cw(c-1287.56,1813.84) -1302.55,1828.83 ; v2@-1308.76,1813.84 cw(c-1287.56,1813.84) -1302.55,1828.83 ; v2@-1308.76,1813.84 cw(c-1287.56,1813.84) -1302.55,1828.83 ; v2@-1308.76,1813.84 cw(c-1287.56,1813.84) -1302.55,1828.83 ; v2@-1308.76,1813.84 cw(c-1287.56,1813.84) -1302.55,1828.83 ; v2@-1308.76,1813.84 cw(c-1287.56,1813.84) -1302.55,1828.83 ; v2@-1308.76,1813.84 cw(c-1287.56,1813.84) -1302.55,1828.83 ; v2@-1308.76,1813.84 cw(c-1287.56,1813.84) -1302.55,1828.83 ; v2@-1308.76,1813.84 cw(c-1287.56,1813.84) -1302.55,1828.83 ; -1291.95,1839.42 ccw(c-1302.41,1849.88) U7.7@-1287.62,1849.88 ; -1291.95,1839.42 ccw(c-1302.41,1849.88) U7.7@-1287.62,1849.88 ; -1291.95,1839.42 ccw(c-1302.41,1849.88) U7.7@-1287.62,1849.88 ; -1291.95,1839.42 ccw(c-1302.41,1849.88) U7.7@-1287.62,1849.88 ; -1155.88,1135.84 cw(c-1155.88,1145.5) -1162.71,1138.67 ccw(c-1155.88,1145.5) -1155.88,1135.84 ; -1155.88,1135.84 ccw(c-1155.88,1126.19) -1162.71,1133.01 cw(c-1155.88,1126.19) -1155.88,1135.84 ; C45.2@-1099.54,1149.84 ccw(c-1104.37,1116.84) -1127.95,1140.42 cw(c-1104.37,1116.84) C45.2@-1099.54,1149.84 ; C45.2@-1099.54,1149.84 -1074.54,1149.84 -1060.54,1135.84 -1060.54,1054.84 ; -1077.54,1037.84 -1060.54,1054.84 ; S8.2@-1056.33,2405.64 ccw(c-1104.13,2453.44) -1036.54,2453.44 ; S8.2@-1056.33,2405.64 ccw(c-1104.13,2453.44) -1036.54,2453.44 ; S8.2@-1056.33,2405.64 ccw(c-1104.13,2453.44) -1036.54,2453.44 ; S8.2@-1056.33,2405.64 ccw(c-1104.13,2453.44) -1036.54,2453.44 ; S8.2@-1056.33,2405.64 ccw(c-1104.13,2453.44) -1036.54,2453.44 ; S8.2@-1056.33,2405.64 ccw(c-1104.13,2453.44) -1036.54,2453.44 ; S8.2@-1056.33,2405.64 ccw(c-1104.13,2453.44) -1036.54,2453.44 ; S8.2@-1056.33,2405.64 ccw(c-1104.13,2453.44) -1036.54,2453.44 ; S8.2@-1056.33,2405.64 ccw(c-1104.13,2453.44) -1036.54,2453.44 ; S8.2@-1049.26,2398.57 ccw(c-1079.99,2429.3) -1036.54,2429.3 ; S8.2@-1049.26,2398.57 ccw(c-1079.99,2429.3) -1036.54,2429.3 ; S8.2@-1049.26,2398.57 ccw(c-1079.99,2429.3) -1036.54,2429.3 ; S8.2@-1049.26,2398.57 ccw(c-1079.99,2429.3) -1036.54,2429.3 ; S8.2@-1049.26,2398.57 ccw(c-1079.99,2429.3) -1036.54,2429.3 ; S8.2@-1049.26,2398.57 ccw(c-1079.99,2429.3) -1036.54,2429.3 ; S8.2@-1049.26,2398.57 ccw(c-1079.99,2429.3) -1036.54,2429.3 ; S8.2@-1049.26,2398.57 ccw(c-1079.99,2429.3) -1036.54,2429.3 ; S8.2@-1049.26,2398.57 ccw(c-1079.99,2429.3) -1036.54,2429.3 ; -1042.74,2465.63 cw(c-1057.73,2450.65) -1036.54,2450.65 ; -1042.74,2465.63 cw(c-1057.73,2450.65) -1036.54,2450.65 ; -1042.74,2465.63 cw(c-1057.73,2450.65) -1036.54,2450.65 ; -1042.74,2465.63 cw(c-1057.73,2450.65) -1036.54,2450.65 ; -1042.74,2465.63 cw(c-1057.73,2450.65) -1036.54,2450.65 ; -1042.74,2465.63 cw(c-1057.73,2450.65) -1036.54,2450.65 ; -1036.54,2429.3 ccw(c-993.08,2429.3) S8.2@-1023.81,2398.57 ; -1036.54,2429.3 ccw(c-993.08,2429.3) S8.2@-1023.81,2398.57 ; -1036.54,2429.3 ccw(c-993.08,2429.3) S8.2@-1023.81,2398.57 ; -1036.54,2429.3 ccw(c-993.08,2429.3) S8.2@-1023.81,2398.57 ; -1036.54,2429.3 ccw(c-993.08,2429.3) S8.2@-1023.81,2398.57 ; -1036.54,2429.3 ccw(c-993.08,2429.3) S8.2@-1023.81,2398.57 ; -1036.54,2429.3 ccw(c-993.08,2429.3) S8.2@-1023.81,2398.57 ; -1036.54,2429.3 ccw(c-993.08,2429.3) S8.2@-1023.81,2398.57 ; -1036.54,2429.3 ccw(c-993.08,2429.3) S8.2@-1023.81,2398.57 ; -1036.54,2450.65 cw(c-1015.34,2450.65) -1030.33,2465.63 ; -1036.54,2450.65 cw(c-1015.34,2450.65) -1030.33,2465.63 ; -1036.54,2450.65 cw(c-1015.34,2450.65) -1030.33,2465.63 ; -1036.54,2450.65 cw(c-1015.34,2450.65) -1030.33,2465.63 ; -1036.54,2450.65 cw(c-1015.34,2450.65) -1030.33,2465.63 ; -1036.54,2450.65 cw(c-1015.34,2450.65) -1030.33,2465.63 ; -1036.54,2453.44 ccw(c-968.94,2453.44) S8.2@-1016.74,2405.64 ; -1036.54,2453.44 ccw(c-968.94,2453.44) S8.2@-1016.74,2405.64 ; -1036.54,2453.44 ccw(c-968.94,2453.44) S8.2@-1016.74,2405.64 ; -1036.54,2453.44 ccw(c-968.94,2453.44) S8.2@-1016.74,2405.64 ; -1036.54,2453.44 ccw(c-968.94,2453.44) S8.2@-1016.74,2405.64 ; -1036.54,2453.44 ccw(c-968.94,2453.44) S8.2@-1016.74,2405.64 ; -1036.54,2453.44 ccw(c-968.94,2453.44) S8.2@-1016.74,2405.64 ; -1036.54,2453.44 ccw(c-968.94,2453.44) S8.2@-1016.74,2405.64 ; -1036.54,2453.44 ccw(c-968.94,2453.44) S8.2@-1016.74,2405.64 ; C24.2@-1027.46,2172.77 cw(c-1010.39,2155.7) -1010.39,2179.84 ; C24.2@-1027.46,2172.77 cw(c-1010.39,2155.7) -1010.39,2179.84 ; C24.2@-1027.46,2172.77 cw(c-1010.39,2155.7) -1010.39,2179.84 ; C24.2@-1027.46,2172.77 cw(c-1010.39,2155.7) -1010.39,2179.84 ; C24.2@-1027.46,2172.77 cw(c-1010.39,2155.7) -1010.39,2179.84 ; C24.2@-1027.46,2172.77 cw(c-1010.39,2155.7) -1010.39,2179.84 ; C24.2@-1027.46,2172.77 cw(c-1010.39,2155.7) -1010.39,2179.84 ; C24.2@-1027.46,2172.77 cw(c-1010.39,2155.7) -1010.39,2179.84 ; C24.2@-1027.46,2172.77 cw(c-1010.39,2155.7) -1010.39,2179.84 ; C24.2@-1027.46,2186.91 ccw(c-1010.39,2203.98) -1010.39,2179.84 ; C24.2@-1027.46,2186.91 ccw(c-1010.39,2203.98) -1010.39,2179.84 ; C24.2@-1027.46,2186.91 ccw(c-1010.39,2203.98) -1010.39,2179.84 ; C24.2@-1027.46,2186.91 ccw(c-1010.39,2203.98) -1010.39,2179.84 ; C24.2@-1027.46,2186.91 ccw(c-1010.39,2203.98) -1010.39,2179.84 ; C24.2@-1027.46,2186.91 ccw(c-1010.39,2203.98) -1010.39,2179.84 ; C24.2@-1027.46,2186.91 ccw(c-1010.39,2203.98) -1010.39,2179.84 ; C24.2@-1027.46,2186.91 ccw(c-1010.39,2203.98) -1010.39,2179.84 ; C24.2@-1027.46,2186.91 ccw(c-1010.39,2203.98) -1010.39,2179.84 ; v2@-967.54,1712.06 cw(c-967.54,1690.87) -952.55,1705.85 ; v2@-967.54,1712.06 cw(c-967.54,1690.87) -952.55,1705.85 ; v2@-967.54,1712.06 cw(c-967.54,1690.87) -952.55,1705.85 ; v2@-967.54,1712.06 cw(c-967.54,1690.87) -952.55,1705.85 ; v2@-967.54,1712.06 cw(c-967.54,1690.87) -952.55,1705.85 ; v2@-967.54,1712.06 cw(c-967.54,1690.87) -952.55,1705.85 ; v2@-967.54,1712.06 cw(c-967.54,1690.87) -952.55,1705.85 ; v2@-967.54,1712.06 cw(c-967.54,1690.87) -952.55,1705.85 ; v2@-967.54,1712.06 cw(c-967.54,1690.87) -952.55,1705.85 ; v2@-958.76,1720.84 ccw(c-937.56,1720.84) -952.55,1705.85 ; v2@-958.76,1720.84 ccw(c-937.56,1720.84) -952.55,1705.85 ; v2@-958.76,1720.84 ccw(c-937.56,1720.84) -952.55,1705.85 ; v2@-958.76,1720.84 ccw(c-937.56,1720.84) -952.55,1705.85 ; v2@-958.76,1720.84 ccw(c-937.56,1720.84) -952.55,1705.85 ; v2@-958.76,1720.84 ccw(c-937.56,1720.84) -952.55,1705.85 ; v2@-958.76,1720.84 ccw(c-937.56,1720.84) -952.55,1705.85 ; v2@-958.76,1720.84 ccw(c-937.56,1720.84) -952.55,1705.85 ; v2@-958.76,1720.84 ccw(c-937.56,1720.84) -952.55,1705.85 ; v2@-918.54,1861.62 ccw(c-918.54,1882.82) -903.55,1867.83 ; v2@-918.54,1861.62 ccw(c-918.54,1882.82) -903.55,1867.83 ; v2@-918.54,1861.62 ccw(c-918.54,1882.82) -903.55,1867.83 ; v2@-918.54,1861.62 ccw(c-918.54,1882.82) -903.55,1867.83 ; v2@-918.54,1861.62 ccw(c-918.54,1882.82) -903.55,1867.83 ; v2@-918.54,1861.62 ccw(c-918.54,1882.82) -903.55,1867.83 ; v2@-918.54,1861.62 ccw(c-918.54,1882.82) -903.55,1867.83 ; v2@-918.54,1861.62 ccw(c-918.54,1882.82) -903.55,1867.83 ; v2@-918.54,1861.62 ccw(c-918.54,1882.82) -903.55,1867.83 ; v2@-909.76,1852.84 cw(c-888.56,1852.84) -903.55,1867.83 ; v2@-909.76,1852.84 cw(c-888.56,1852.84) -903.55,1867.83 ; v2@-909.76,1852.84 cw(c-888.56,1852.84) -903.55,1867.83 ; v2@-909.76,1852.84 cw(c-888.56,1852.84) -903.55,1867.83 ; v2@-909.76,1852.84 cw(c-888.56,1852.84) -903.55,1867.83 ; v2@-909.76,1852.84 cw(c-888.56,1852.84) -903.55,1867.83 ; v2@-909.76,1852.84 cw(c-888.56,1852.84) -903.55,1867.83 ; v2@-909.76,1852.84 cw(c-888.56,1852.84) -903.55,1867.83 ; v2@-909.76,1852.84 cw(c-888.56,1852.84) -903.55,1867.83 ; -900.53,1870.84 cw(c-900.53,1836.75) RP4.2@-874.06,1858.24 ; -900.53,1870.84 ccw(c-900.53,1904.94) RP4.2@-874.06,1883.45 ; -900.53,1870.84 cw(c-900.53,1836.75) RP4.2@-874.06,1858.24 ; -900.53,1870.84 ccw(c-900.53,1904.94) RP4.2@-874.06,1883.45 ; -900.53,1870.84 cw(c-900.53,1836.75) RP4.2@-874.06,1858.24 ; -900.53,1870.84 ccw(c-900.53,1904.94) RP4.2@-874.06,1883.45 ; -900.53,1870.84 cw(c-900.53,1836.75) RP4.2@-874.06,1858.24 ; -900.53,1870.84 ccw(c-900.53,1904.94) RP4.2@-874.06,1883.45 ; -900.53,1870.84 cw(c-900.53,1836.75) RP4.2@-874.06,1858.24 ; -900.53,1870.84 ccw(c-900.53,1904.94) RP4.2@-874.06,1883.45 ; -900.53,1870.84 ccw(c-900.53,1904.94) RP4.2@-874.06,1883.45 ; -900.53,1870.84 cw(c-900.53,1836.75) RP4.2@-874.06,1858.24 ; -900.53,1870.84 ccw(c-900.53,1904.94) RP4.2@-874.06,1883.45 ; -900.53,1870.84 cw(c-900.53,1836.75) RP4.2@-874.06,1858.24 ; -900.53,1870.84 ccw(c-900.53,1904.94) RP4.2@-874.06,1883.45 ; -900.53,1870.84 cw(c-900.53,1836.75) RP4.2@-874.06,1858.24 ; -900.53,1870.84 ccw(c-900.53,1904.94) RP4.2@-874.06,1883.45 ; -900.53,1870.84 cw(c-900.53,1836.75) RP4.2@-874.06,1858.24 ; R23.2@-842.69,1554.95 ccw(c-859.76,1572.02) -835.62,1572.02 ; R23.2@-842.69,1554.95 ccw(c-859.76,1572.02) -835.62,1572.02 ; R23.2@-842.69,1554.95 ccw(c-859.76,1572.02) -835.62,1572.02 ; R23.2@-842.69,1554.95 ccw(c-859.76,1572.02) -835.62,1572.02 ; R23.2@-842.69,1554.95 ccw(c-859.76,1572.02) -835.62,1572.02 ; R23.2@-842.69,1554.95 ccw(c-859.76,1572.02) -835.62,1572.02 ; R23.2@-842.69,1554.95 ccw(c-859.76,1572.02) -835.62,1572.02 ; R23.2@-842.69,1554.95 ccw(c-859.76,1572.02) -835.62,1572.02 ; R23.2@-842.69,1554.95 ccw(c-859.76,1572.02) -835.62,1572.02 ; C25.2@-842.69,1642.81 cw(c-859.76,1625.74) -835.62,1625.74 ; C25.2@-842.69,1642.81 cw(c-859.76,1625.74) -835.62,1625.74 ; C25.2@-842.69,1642.81 cw(c-859.76,1625.74) -835.62,1625.74 ; C25.2@-842.69,1642.81 cw(c-859.76,1625.74) -835.62,1625.74 ; C25.2@-842.69,1642.81 cw(c-859.76,1625.74) -835.62,1625.74 ; C25.2@-842.69,1642.81 cw(c-859.76,1625.74) -835.62,1625.74 ; C25.2@-842.69,1642.81 cw(c-859.76,1625.74) -835.62,1625.74 ; C25.2@-842.69,1642.81 cw(c-859.76,1625.74) -835.62,1625.74 ; C25.2@-842.69,1642.81 cw(c-859.76,1625.74) -835.62,1625.74 ; -835.62,1572.02 ccw(c-811.48,1572.02) R23.2@-828.55,1554.95 ; -835.62,1572.02 ccw(c-811.48,1572.02) R23.2@-828.55,1554.95 ; -835.62,1572.02 ccw(c-811.48,1572.02) R23.2@-828.55,1554.95 ; -835.62,1572.02 ccw(c-811.48,1572.02) R23.2@-828.55,1554.95 ; -835.62,1572.02 ccw(c-811.48,1572.02) R23.2@-828.55,1554.95 ; -835.62,1572.02 ccw(c-811.48,1572.02) R23.2@-828.55,1554.95 ; -835.62,1572.02 ccw(c-811.48,1572.02) R23.2@-828.55,1554.95 ; -835.62,1572.02 ccw(c-811.48,1572.02) R23.2@-828.55,1554.95 ; -835.62,1572.02 ccw(c-811.48,1572.02) R23.2@-828.55,1554.95 ; -835.62,1625.74 cw(c-811.48,1625.74) C25.2@-828.55,1642.81 ; -835.62,1625.74 cw(c-811.48,1625.74) C25.2@-828.55,1642.81 ; -835.62,1625.74 cw(c-811.48,1625.74) C25.2@-828.55,1642.81 ; -835.62,1625.74 cw(c-811.48,1625.74) C25.2@-828.55,1642.81 ; -835.62,1625.74 cw(c-811.48,1625.74) C25.2@-828.55,1642.81 ; -835.62,1625.74 cw(c-811.48,1625.74) C25.2@-828.55,1642.81 ; -835.62,1625.74 cw(c-811.48,1625.74) C25.2@-828.55,1642.81 ; -835.62,1625.74 cw(c-811.48,1625.74) C25.2@-828.55,1642.81 ; -835.62,1625.74 cw(c-811.48,1625.74) C25.2@-828.55,1642.81 ; -757.54,1297.84 -757.54,1396.84 v2(-737.54,1416.84) -731.54,1410.84 -731.54,1298.84 ; -734.54,1295.84 -731.54,1298.84 ; -672.34,1156.84 cw(c-672.34,1178.04) -687.33,1163.05 ccw(c-672.34,1178.04) -672.34,1156.84 ; -672.34,1156.84 ccw(c-672.34,1135.65) -687.33,1150.63 cw(c-672.34,1135.65) -672.34,1156.84 ; -576.73,1156.84 cw(c-576.73,1135.65) -561.74,1150.63 ccw(c-576.73,1135.65) -576.73,1156.84 ; -576.73,1156.84 ccw(c-576.73,1178.04) -561.74,1163.05 cw(c-576.73,1178.04) -576.73,1156.84 ; -3198.54,173.84 ccw(c-3157.54,221.84) -3109.54,180.84 cw(c-3140.04,180.34) -3139.54,149.84 cw(c-3157.04,191.34) -3198.54,173.84 ; C45.2@-1113.87,1154.51 cw(c-1100.77,1141.4) -1098.09,1159.74 ccw(c-1100.77,1141.4) C45.2@-1113.87,1154.51
  TopLayer w15: v3@-1416,1427 -1413.54,1424.54 v3(-1413.54,1409) U8.39@-1413.54,1360.84 -1413.54,1317.54 -1400.5,1304.5 v3(-1330,1304.5)
  TopLayer w30: R_P5.2@-3542.54,1112.84 -3513.54,1112.84 R_P6.2@-3490.54,1135.84 ; R_P3.2@-3498.54,748.84 -3481.54,765.84 UP1.5@-3481.54,840.54 ; -3491.54,705.84 R_P3.2@-3491.54,754.84 ; UP1.5@-3481.54,871.84 UP1.5@-3481.54,840.54 ; -3481.54,984.84 UP1.5@-3481.54,840.54 ; -2408,1195 EXT-A2.2@-2355,1195 -2306,1195 -2284,1217
  other v1: -209.54,66.84 -545.54,72.84 -503.54,72.84 -1197.54,77.84 -1155.54,77.84 -870.54,77.84 -828.54,77.84 -1511.54,78.84 -1469.54,78.84 -209.54,106.84 -545.54,112.84 -503.54,112.84 -1197.54,117.84 -1155.54,117.84 -870.54,117.84 -828.54,117.84 -1511.54,118.84 -1469.54,118.84 -209.54,146.84 -545.54,152.84 -503.54,152.84 -1197.54,157.84 -1155.54,157.84 -870.54,157.84 -828.54,157.84 -1511.54,158.84 -1469.54,158.84 -545.54,192.84 -503.54,192.84 -1197.54,197.84 -1155.54,197.84 -870.54,197.84 -828.54,197.84 -1511.54,198.84 -1469.54,198.84 -545.54,232.84 -503.54,232.84 -1197.54,237.84 -1155.54,237.84 -870.54,237.84 -828.54,237.84 -1511.54,238.84 -1469.54,238.84 -3883.54,519.84 -3917.54,521.84 -395.54,534.84 -353.54,534.84 -3883.54,559.84 -3917.54,561.84 -395.54,574.84 -353.54,574.84 -1701.54,590.84 -1661.54,590.84 -1621.54,590.84 -1581.54,590.84 -3883.54,596.84 -3917.54,598.84 -1701.54,632.84 -1661.54,632.84 -1621.54,632.84 -1581.54,632.84 -3883.54,636.84 -3917.54,638.84 -3140.54,670.84 -3098.54,670.84 -3880.54,676.84 -3914.54,678.84 -2246.54,687.84 -2883.54,694.84 -2844.54,694.84 -2807.54,695.84 -2573.54,695.84 -2533.54,695.84 -2493.54,695.84 -3140.54,710.84 -3098.54,710.84 -3880.54,716.84 -3914.54,718.84 -2246.54,729.84 -3140.54,750.84 -3098.54,750.84 -3140.54,790.84 -3098.54,790.84 -3880.54,829.84 -3914.54,831.84 -3880.54,869.84 -3914.54,871.84 -3880.54,906.84 -3914.54,908.84 -3880.54,946.84 -3914.54,948.84 -108.54,982.84 -66.54,982.84 -3877.54,986.84 -3911.54,988.84 -108.54,1022.84 -66.54,1022.84 -3877.54,1026.84 -3911.54,1028.84 -108.54,1062.84 -66.54,1062.84 -3877.54,1063.84 -3911.54,1065.84 -3877.54,1103.84 -3911.54,1105.84 -2178.54,1265.84 -2138.54,1265.84 -2178.54,1307.84 -2138.54,1307.84 -3635.54,1456.84 -3595.54,1456.84 -3555.54,1456.84 -3515.54,1456.84 -3471.54,1456.84 -1359.54,2433.84 -1319.54,2433.84 -1279.54,2433.84 -1100.54,2446.84 -1060.54,2446.84 -1020.54,2446.84 -3480.54,2463.84 -3440.54,2463.84 -3400.54,2463.84 -2938.54,2464.84 -2898.54,2464.84 -2858.54,2464.84 -3741.54,2469.84 -3701.54,2469.84 -3661.54,2469.84 -2675.54,2473.84 -2635.54,2473.84 -2595.54,2473.84 -1359.54,2475.84 -1319.54,2475.84 -1279.54,2475.84 -2133.54,2477.84 -2093.54,2477.84 -2053.54,2477.84 -1868.54,2479.84 -1828.54,2479.84 -1788.54,2479.84 -1100.54,2488.84 -1060.54,2488.84 -1020.54,2488.84 -3192.54,2501.84 -3150.54,2501.84 -3480.54,2505.84 -3440.54,2505.84 -3400.54,2505.84 -2938.54,2506.84 -2898.54,2506.84 -2858.54,2506.84 -3741.54,2511.84 -3701.54,2511.84 -3661.54,2511.84 -2675.54,2515.84 -2635.54,2515.84 -2595.54,2515.84 -2133.54,2519.84 -2093.54,2519.84 -2053.54,2519.84 -1868.54,2521.84 -1828.54,2521.84 -1788.54,2521.84 -2396.54,2527.84 -2354.54,2527.84 -1635.54,2534.84 -1593.54,2534.84 -3192.54,2541.84 -3150.54,2541.84 -899.54,2545.84 -857.54,2545.84 -2396.54,2567.84 -2354.54,2567.84 -1635.54,2574.84 -1593.54,2574.84 -899.54,2585.84 -857.54,2585.84 -2396.54,2607.84 -2354.54,2607.84 -1635.54,2614.84 -1593.54,2614.84 -899.54,2625.84 -857.54,2625.84 -2396.54,2647.84 -2354.54,2647.84 -1635.54,2654.84 -1593.54,2654.84 -899.54,2665.84 -857.54,2665.84 -2396.54,2687.84 -2354.54,2687.84 -1635.54,2694.84 -1593.54,2694.84 -899.54,2705.84 -857.54,2705.84
  other v2: -779.54,1127.84 -1699.54,1135.84 -499.54,1156.84 -693.54,1192.84 -382.54,1210.84 -3173,1543 -2950.54,1583.84 -2146.54,1609.84 -112.54,1693.84 -114.54,1789.84 -545.54,1890.84 -489.54,1891.84 -1683.54,1999.84 -1619.54,2024.84 -250.54,2235.84 -314.54,2262.84 -254.54,2286.84 -314.54,2306.84 -254.54,2330.84 -314.54,2350.84 -254.54,2374.84
  other v3: -461.54,346.84 -1365.54,414.84 -1148.54,416.84 -931.54,416.84 -714.54,418.84 -3230.54,581.84 -3430,656 -3275.54,655.84 -3330.54,656.84 -3490,658 -3458,658 -3028.54,670.84 -3431,684 -3489.54,691.84 -3457,692 -3431,715 -3457,716 -3490.54,718.84 -2986.54,754.84 -2888.54,757.84 -2888.54,785.84 -2888.54,813.84 -1380.54,855.84 -2806.54,866.84 -2830.54,867.84 -2876.54,869.84 -2853.54,869.84 -2475.54,870.84 -2549.54,871.84 -2526.54,871.84 -2503.54,871.84 -2230.54,874.84 -2207.54,874.84 -2184.54,874.84 -2161.54,874.84 -2552.54,895.84 -2529.54,895.84 -2503.54,895.84 -2474.54,895.84 -2425.54,902.84 -2400.54,903.84 -3215.54,911.84 -3545.54,938.84 -2430.54,944.84 -1377.54,960.84 -1566.54,972.84 -1246.54,973.84 -1522.54,976.84 -3595.54,980.84 -3545.54,980.84 -3031.54,1003.84 -2585,1017 -2499,1017 -3596.54,1017.84 -3545.54,1017.84 -2539,1018 -2781,1058 -2811,1060 -2965.54,1061.84 -2273,1072 -2249,1072 -2781,1092 -2812,1095 -2274,1100 -2249,1101 -3572.79,1112.84 -2000.54,1120.84 -2082.54,1122.84 -2249,1125 -2274,1126 -2782,1128 -2811,1131 -2434,1138 -3542.54,1142.84 -2041.54,1166.84 -2418,1195 -2441,1196 -2086.54,1207.84 -2920,1209 -1999.54,1208.84 -3380.54,1223.84 -2140,1232 -2179,1233 -2887,1247 -2920,1248 -3755.54,1249.84 -2261,1261 -2433,1264 -3638.54,1270.84 -2277,1276 -2850,1283 -2887,1286 -2921,1293 -1349,1304.5 -2474,1334 -2576,1336 -2526,1336 -3636.54,1344.84 -1414,1430 -2211,1438 -3235,1462 -3269,1463 -2233,1463 -3301,1465 -3235,1489 -3269,1491 -3301,1492 -157.54,2017.84 -236.54,2071.84 -85.54,2071.84 -160.54,2138.84 -161.54,2668.84 -236.54,2714.84 -86.54,2715.84
  other v5: -2794.54,1873.84 -2735.54,1875.84 -1984.54,1876.84 -3593.54,1878.84 -1928.54,1879.84 -3531.54,1880.84 -1201.54,1880.84 -1148.54,1882.84 -2794.54,1931.84 -1980.54,1932.84 -3590.54,1933.84 -2734.54,1933.84 -1200.54,1934.84 -3530.54,1935.84 -1927.54,1935.84 -1146.54,1937.84
  other v6: -3465.59,907.47 -3426.22,907.47 -3386.85,907.47 -3347.48,907.47 -3465.59,946.84 -3426.22,946.84 -3386.85,946.84 -3347.48,946.84 -3465.59,986.21 -3426.22,986.21 -3386.85,986.21 -3347.48,986.21
  other v7: -2206.54,687.84 -2166.54,687.84 -2206.54,729.84 -2166.54,729.84